# EAGLE board Type-C_Panelized (EAGLE 9.5.2)
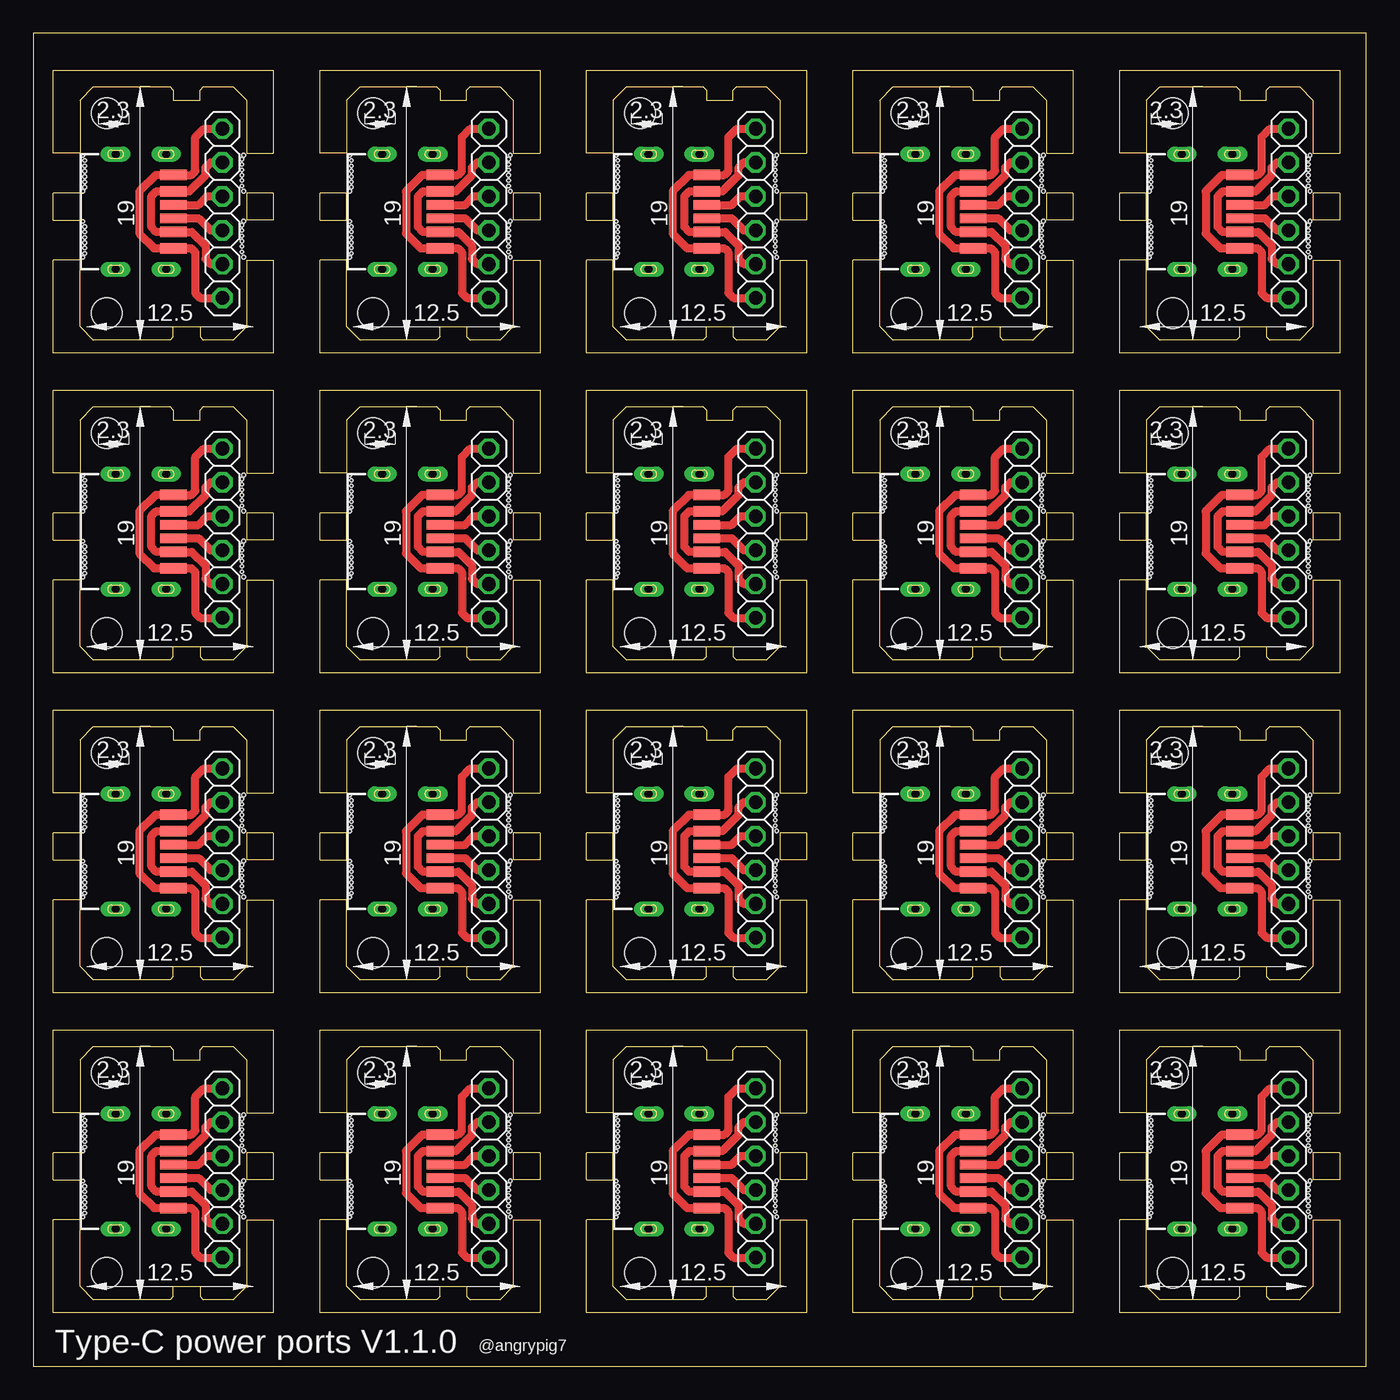
[diagram p0: board, top side]
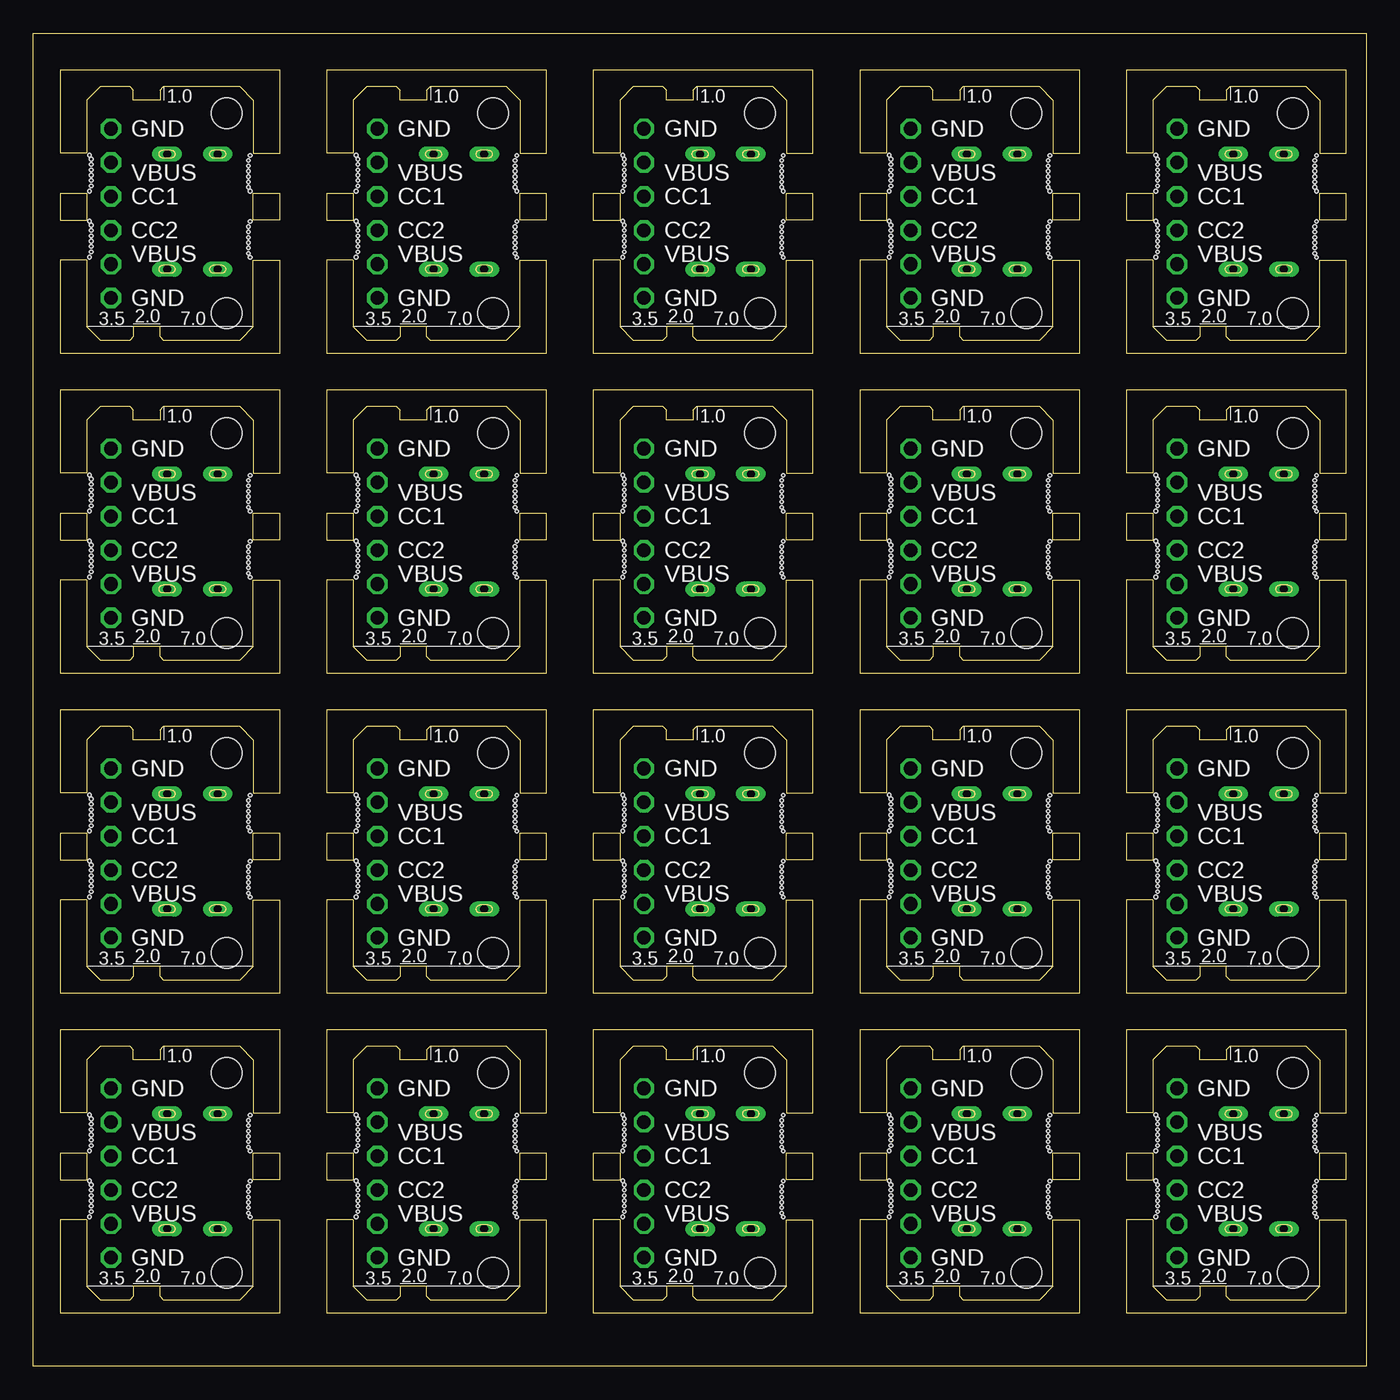
[diagram p1: board, bottom side, seen from below]

Size 100 x 100 mm. Coordinates in mm from the lower left corner, seen from the top.
Outline: 3.5,78 3.5,83 1.5,83 1.5,76.02 18,76.02 18,83 16,83 16,78 15,77 12.75,77 12.5,77.25 12.5,78 10.5,78 10.5,77.25 10.25,77 4.5,77 3.5,78
Outline: 3.5,86 3.5,88 1.5,88 1.5,86 3.5,86
Outline: 4.5,96 10.25,96 10.5,95.75 10.5,95 12.5,95 12.5,95.75 12.75,96 15,96 16,95 16,91 18,91 18,97.25 1.5,97.25 1.5,91 3.5,91 3.5,95 4.5,96
Outline: 16,88 16,86 18,86 18,88 16,88
Outline: 0,0 100,0 100,100 0,100 0,0
Outline: 23.5,78 23.5,83 21.5,83 21.5,76.02 38,76.02 38,83 36,83 36,78 35,77 32.75,77 32.5,77.25 32.5,78 30.5,78 30.5,77.25 30.25,77 24.5,77 23.5,78
Outline: 23.5,86 23.5,88 21.5,88 21.5,86 23.5,86
Outline: 24.5,96 30.25,96 30.5,95.75 30.5,95 32.5,95 32.5,95.75 32.75,96 35,96 36,95 36,91 38,91 38,97.25 21.5,97.25 21.5,91 23.5,91 23.5,95 24.5,96
Outline: 36,88 36,86 38,86 38,88 36,88
Outline: 43.5,78 43.5,83 41.5,83 41.5,76.02 58,76.02 58,83 56,83 56,78 55,77 52.75,77 52.5,77.25 52.5,78 50.5,78 50.5,77.25 50.25,77 44.5,77 43.5,78
Outline: 43.5,86 43.5,88 41.5,88 41.5,86 43.5,86
Outline: 44.5,96 50.25,96 50.5,95.75 50.5,95 52.5,95 52.5,95.75 52.75,96 55,96 56,95 56,91 58,91 58,97.25 41.5,97.25 41.5,91 43.5,91 43.5,95 44.5,96
Outline: 56,88 56,86 58,86 58,88 56,88
Outline: 63.5,78 63.5,83 61.5,83 61.5,76.02 78,76.02 78,83 76,83 76,78 75,77 72.75,77 72.5,77.25 72.5,78 70.5,78 70.5,77.25 70.25,77 64.5,77 63.5,78
Outline: 63.5,86 63.5,88 61.5,88 61.5,86 63.5,86
Outline: 64.5,96 70.25,96 70.5,95.75 70.5,95 72.5,95 72.5,95.75 72.75,96 75,96 76,95 76,91 78,91 78,97.25 61.5,97.25 61.5,91 63.5,91 63.5,95 64.5,96
Outline: 76,88 76,86 78,86 78,88 76,88
Outline: 83.5,78 83.5,83 81.5,83 81.5,76.02 98,76.02 98,83 96,83 96,78 95,77 92.75,77 92.5,77.25 92.5,78 90.5,78 90.5,77.25 90.25,77 84.5,77 83.5,78
Outline: 83.5,86 83.5,88 81.5,88 81.5,86 83.5,86
Outline: 84.5,96 90.25,96 90.5,95.75 90.5,95 92.5,95 92.5,95.75 92.75,96 95,96 96,95 96,91 98,91 98,97.25 81.5,97.25 81.5,91 83.5,91 83.5,95 84.5,96
Outline: 96,88 96,86 98,86 98,88 96,88
Outline: 3.5,54 3.5,59 1.5,59 1.5,52.02 18,52.02 18,59 16,59 16,54 15,53 12.75,53 12.5,53.25 12.5,54 10.5,54 10.5,53.25 10.25,53 4.5,53 3.5,54
Outline: 3.5,62 3.5,64 1.5,64 1.5,62 3.5,62
Outline: 4.5,72 10.25,72 10.5,71.75 10.5,71 12.5,71 12.5,71.75 12.75,72 15,72 16,71 16,67 18,67 18,73.25 1.5,73.25 1.5,67 3.5,67 3.5,71 4.5,72
Outline: 16,64 16,62 18,62 18,64 16,64
Outline: 23.5,54 23.5,59 21.5,59 21.5,52.02 38,52.02 38,59 36,59 36,54 35,53 32.75,53 32.5,53.25 32.5,54 30.5,54 30.5,53.25 30.25,53 24.5,53 23.5,54
Outline: 23.5,62 23.5,64 21.5,64 21.5,62 23.5,62
Outline: 24.5,72 30.25,72 30.5,71.75 30.5,71 32.5,71 32.5,71.75 32.75,72 35,72 36,71 36,67 38,67 38,73.25 21.5,73.25 21.5,67 23.5,67 23.5,71 24.5,72
Outline: 36,64 36,62 38,62 38,64 36,64
Outline: 43.5,54 43.5,59 41.5,59 41.5,52.02 58,52.02 58,59 56,59 56,54 55,53 52.75,53 52.5,53.25 52.5,54 50.5,54 50.5,53.25 50.25,53 44.5,53 43.5,54
Outline: 43.5,62 43.5,64 41.5,64 41.5,62 43.5,62
Outline: 44.5,72 50.25,72 50.5,71.75 50.5,71 52.5,71 52.5,71.75 52.75,72 55,72 56,71 56,67 58,67 58,73.25 41.5,73.25 41.5,67 43.5,67 43.5,71 44.5,72
Outline: 56,64 56,62 58,62 58,64 56,64
Outline: 63.5,54 63.5,59 61.5,59 61.5,52.02 78,52.02 78,59 76,59 76,54 75,53 72.75,53 72.5,53.25 72.5,54 70.5,54 70.5,53.25 70.25,53 64.5,53 63.5,54
Outline: 63.5,62 63.5,64 61.5,64 61.5,62 63.5,62
Outline: 64.5,72 70.25,72 70.5,71.75 70.5,71 72.5,71 72.5,71.75 72.75,72 75,72 76,71 76,67 78,67 78,73.25 61.5,73.25 61.5,67 63.5,67 63.5,71 64.5,72
Outline: 76,64 76,62 78,62 78,64 76,64
Outline: 83.5,54 83.5,59 81.5,59 81.5,52.02 98,52.02 98,59 96,59 96,54 95,53 92.75,53 92.5,53.25 92.5,54 90.5,54 90.5,53.25 90.25,53 84.5,53 83.5,54
Outline: 83.5,62 83.5,64 81.5,64 81.5,62 83.5,62
Outline: 84.5,72 90.25,72 90.5,71.75 90.5,71 92.5,71 92.5,71.75 92.75,72 95,72 96,71 96,67 98,67 98,73.25 81.5,73.25 81.5,67 83.5,67 83.5,71 84.5,72
Outline: 96,64 96,62 98,62 98,64 96,64
Outline: 3.5,30 3.5,35 1.5,35 1.5,28.02 18,28.02 18,35 16,35 16,30 15,29 12.75,29 12.5,29.25 12.5,30 10.5,30 10.5,29.25 10.25,29 4.5,29 3.5,30
Outline: 3.5,38 3.5,40 1.5,40 1.5,38 3.5,38
Outline: 4.5,48 10.25,48 10.5,47.75 10.5,47 12.5,47 12.5,47.75 12.75,48 15,48 16,47 16,43 18,43 18,49.25 1.5,49.25 1.5,43 3.5,43 3.5,47 4.5,48
Outline: 16,40 16,38 18,38 18,40 16,40
Outline: 23.5,30 23.5,35 21.5,35 21.5,28.02 38,28.02 38,35 36,35 36,30 35,29 32.75,29 32.5,29.25 32.5,30 30.5,30 30.5,29.25 30.25,29 24.5,29 23.5,30
Outline: 23.5,38 23.5,40 21.5,40 21.5,38 23.5,38
Outline: 24.5,48 30.25,48 30.5,47.75 30.5,47 32.5,47 32.5,47.75 32.75,48 35,48 36,47 36,43 38,43 38,49.25 21.5,49.25 21.5,43 23.5,43 23.5,47 24.5,48
Outline: 36,40 36,38 38,38 38,40 36,40
Outline: 43.5,30 43.5,35 41.5,35 41.5,28.02 58,28.02 58,35 56,35 56,30 55,29 52.75,29 52.5,29.25 52.5,30 50.5,30 50.5,29.25 50.25,29 44.5,29 43.5,30
Outline: 43.5,38 43.5,40 41.5,40 41.5,38 43.5,38
Outline: 44.5,48 50.25,48 50.5,47.75 50.5,47 52.5,47 52.5,47.75 52.75,48 55,48 56,47 56,43 58,43 58,49.25 41.5,49.25 41.5,43 43.5,43 43.5,47 44.5,48
Outline: 56,40 56,38 58,38 58,40 56,40
Outline: 63.5,30 63.5,35 61.5,35 61.5,28.02 78,28.02 78,35 76,35 76,30 75,29 72.75,29 72.5,29.25 72.5,30 70.5,30 70.5,29.25 70.25,29 64.5,29 63.5,30
Outline: 63.5,38 63.5,40 61.5,40 61.5,38 63.5,38
Outline: 64.5,48 70.25,48 70.5,47.75 70.5,47 72.5,47 72.5,47.75 72.75,48 75,48 76,47 76,43 78,43 78,49.25 61.5,49.25 61.5,43 63.5,43 63.5,47 64.5,48
Outline: 76,40 76,38 78,38 78,40 76,40
Outline: 83.5,30 83.5,35 81.5,35 81.5,28.02 98,28.02 98,35 96,35 96,30 95,29 92.75,29 92.5,29.25 92.5,30 90.5,30 90.5,29.25 90.25,29 84.5,29 83.5,30
Outline: 83.5,38 83.5,40 81.5,40 81.5,38 83.5,38
Outline: 84.5,48 90.25,48 90.5,47.75 90.5,47 92.5,47 92.5,47.75 92.75,48 95,48 96,47 96,43 98,43 98,49.25 81.5,49.25 81.5,43 83.5,43 83.5,47 84.5,48
Outline: 96,40 96,38 98,38 98,40 96,40
Outline: 3.5,6 3.5,11 1.5,11 1.5,4.02 18,4.02 18,11 16,11 16,6 15,5 12.75,5 12.5,5.25 12.5,6 10.5,6 10.5,5.25 10.25,5 4.5,5 3.5,6
Outline: 3.5,14 3.5,16 1.5,16 1.5,14 3.5,14
Outline: 4.5,24 10.25,24 10.5,23.75 10.5,23 12.5,23 12.5,23.75 12.75,24 15,24 16,23 16,19 18,19 18,25.25 1.5,25.25 1.5,19 3.5,19 3.5,23 4.5,24
Outline: 16,16 16,14 18,14 18,16 16,16
Outline: 23.5,6 23.5,11 21.5,11 21.5,4.02 38,4.02 38,11 36,11 36,6 35,5 32.75,5 32.5,5.25 32.5,6 30.5,6 30.5,5.25 30.25,5 24.5,5 23.5,6
Outline: 23.5,14 23.5,16 21.5,16 21.5,14 23.5,14
Outline: 24.5,24 30.25,24 30.5,23.75 30.5,23 32.5,23 32.5,23.75 32.75,24 35,24 36,23 36,19 38,19 38,25.25 21.5,25.25 21.5,19 23.5,19 23.5,23 24.5,24
Outline: 36,16 36,14 38,14 38,16 36,16
Outline: 43.5,6 43.5,11 41.5,11 41.5,4.02 58,4.02 58,11 56,11 56,6 55,5 52.75,5 52.5,5.25 52.5,6 50.5,6 50.5,5.25 50.25,5 44.5,5 43.5,6
Outline: 43.5,14 43.5,16 41.5,16 41.5,14 43.5,14
Outline: 44.5,24 50.25,24 50.5,23.75 50.5,23 52.5,23 52.5,23.75 52.75,24 55,24 56,23 56,19 58,19 58,25.25 41.5,25.25 41.5,19 43.5,19 43.5,23 44.5,24
Outline: 56,16 56,14 58,14 58,16 56,16
Outline: 63.5,6 63.5,11 61.5,11 61.5,4.02 78,4.02 78,11 76,11 76,6 75,5 72.75,5 72.5,5.25 72.5,6 70.5,6 70.5,5.25 70.25,5 64.5,5 63.5,6
Outline: 63.5,14 63.5,16 61.5,16 61.5,14 63.5,14
Outline: 64.5,24 70.25,24 70.5,23.75 70.5,23 72.5,23 72.5,23.75 72.75,24 75,24 76,23 76,19 78,19 78,25.25 61.5,25.25 61.5,19 63.5,19 63.5,23 64.5,24
Outline: 76,16 76,14 78,14 78,16 76,16
Outline: 83.5,6 83.5,11 81.5,11 81.5,4.02 98,4.02 98,11 96,11 96,6 95,5 92.75,5 92.5,5.25 92.5,6 90.5,6 90.5,5.25 90.25,5 84.5,5 83.5,6
Outline: 83.5,14 83.5,16 81.5,16 81.5,14 83.5,14
Outline: 84.5,24 90.25,24 90.5,23.75 90.5,23 92.5,23 92.5,23.75 92.75,24 95,24 96,23 96,19 98,19 98,25.25 81.5,25.25 81.5,19 83.5,19 83.5,23 84.5,24
Outline: 96,16 96,14 98,14 98,16 96,16
Copper layers (1*16): Top 0.035mm / dielectric 1.5mm / Bottom 0.035mm
Design rules "default *": minimum track width 6mil, minimum drill 0.35mm, track to track 6mil, track to pad 6mil, pad to pad 6mil, via to via 6mil, smd to smd 6mil, copper to edge 4mil, drill to drill 6mil, minimum pad ring 10mil, minimum via ring 8mil, stop-mask expansion 4mil, vias tented up to drill 0mil, thermal gap 10mil
Holes 2.3 mm at 5.5,94 5.5,79 25.5,94 25.5,79 45.5,94 45.5,79 65.5,94 65.5,79 85.5,94 85.5,79 5.5,70 5.5,55 25.5,70 25.5,55 45.5,70 45.5,55 65.5,70 65.5,55 85.5,70 85.5,55 5.5,46 5.5,31 25.5,46 25.5,31 45.5,46 45.5,31 65.5,46 65.5,31 85.5,46 85.5,31 5.5,22 5.5,7 25.5,22 25.5,7 45.5,22 45.5,7 65.5,22 65.5,7 85.5,22 85.5,7
Holes 0.25 mm at 3.73,90.85 3.85,90.45 3.85,90.05 3.85,89.65 3.85,89.25 3.85,88.85 3.85,88.45 3.73,88.15 3.73,85.9 3.85,85.5 3.85,85.1 3.85,84.7 3.85,84.3 3.85,83.9 3.85,83.5 3.73,83.2 15.78,88.15 15.65,88.55 15.65,88.95 15.65,89.35 15.65,89.75 15.65,90.15 15.65,90.55 15.78,90.85 15.78,83.2 15.65,83.6 15.65,84 15.65,84.4 15.65,84.8 15.65,85.2 15.65,85.6 15.78,85.9 23.73,90.85 23.85,90.45 23.85,90.05 23.85,89.65 23.85,89.25 23.85,88.85 23.85,88.45 23.73,88.15 23.73,85.9 23.85,85.5 23.85,85.1 23.85,84.7 23.85,84.3 23.85,83.9 23.85,83.5 23.73,83.2 35.78,88.15 35.65,88.55 35.65,88.95 35.65,89.35 35.65,89.75 35.65,90.15 35.65,90.55 35.78,90.85 35.78,83.2 35.65,83.6 35.65,84 35.65,84.4 35.65,84.8 35.65,85.2 35.65,85.6 35.78,85.9 43.73,90.85 43.85,90.45 43.85,90.05 43.85,89.65 43.85,89.25 43.85,88.85 43.85,88.45 43.73,88.15 43.73,85.9 43.85,85.5 43.85,85.1 43.85,84.7 43.85,84.3 43.85,83.9 43.85,83.5 43.73,83.2 55.78,88.15 55.65,88.55 55.65,88.95 55.65,89.35 55.65,89.75 55.65,90.15 55.65,90.55 55.78,90.85 55.78,83.2 55.65,83.6 55.65,84 55.65,84.4 55.65,84.8 55.65,85.2 55.65,85.6 55.78,85.9 63.73,90.85 63.85,90.45 63.85,90.05 63.85,89.65 63.85,89.25 63.85,88.85 63.85,88.45 63.73,88.15 63.73,85.9 63.85,85.5 63.85,85.1 63.85,84.7 63.85,84.3 63.85,83.9 63.85,83.5 63.73,83.2 75.78,88.15 75.65,88.55 75.65,88.95 75.65,89.35 75.65,89.75 75.65,90.15 75.65,90.55 75.78,90.85 75.78,83.2 75.65,83.6 75.65,84 75.65,84.4 75.65,84.8 75.65,85.2 75.65,85.6 75.78,85.9 83.73,90.85 83.85,90.45 83.85,90.05 83.85,89.65 83.85,89.25 83.85,88.85 83.85,88.45 83.73,88.15 83.73,85.9 83.85,85.5 83.85,85.1 83.85,84.7 83.85,84.3 83.85,83.9 83.85,83.5 83.73,83.2 95.78,88.15 95.65,88.55 95.65,88.95 95.65,89.35 95.65,89.75 95.65,90.15 95.65,90.55 95.78,90.85 95.78,83.2 95.65,83.6 95.65,84 95.65,84.4 95.65,84.8 95.65,85.2 95.65,85.6 95.78,85.9 3.73,66.85 3.85,66.45 3.85,66.05 3.85,65.65 3.85,65.25 3.85,64.85 3.85,64.45 3.73,64.15 3.73,61.9 3.85,61.5 3.85,61.1 3.85,60.7 3.85,60.3 3.85,59.9 3.85,59.5 3.73,59.2 15.78,64.15 15.65,64.55 15.65,64.95 15.65,65.35 15.65,65.75 15.65,66.15 15.65,66.55 15.78,66.85 15.78,59.2 15.65,59.6 15.65,60 15.65,60.4 15.65,60.8 15.65,61.2 15.65,61.6 15.78,61.9 23.73,66.85 23.85,66.45 23.85,66.05 23.85,65.65 23.85,65.25 23.85,64.85 23.85,64.45 23.73,64.15 23.73,61.9 23.85,61.5 23.85,61.1 23.85,60.7 23.85,60.3 23.85,59.9 23.85,59.5 23.73,59.2 35.78,64.15 35.65,64.55 35.65,64.95 35.65,65.35 35.65,65.75 35.65,66.15 35.65,66.55 35.78,66.85 35.78,59.2 35.65,59.6 35.65,60 35.65,60.4 35.65,60.8 35.65,61.2 35.65,61.6 35.78,61.9 43.73,66.85 43.85,66.45 43.85,66.05 43.85,65.65 43.85,65.25 43.85,64.85 43.85,64.45 43.73,64.15 43.73,61.9 43.85,61.5 43.85,61.1 43.85,60.7 43.85,60.3 43.85,59.9 43.85,59.5 43.73,59.2 55.78,64.15 55.65,64.55 55.65,64.95 55.65,65.35 55.65,65.75 55.65,66.15 55.65,66.55 55.78,66.85 55.78,59.2 55.65,59.6 55.65,60 55.65,60.4 55.65,60.8 55.65,61.2 55.65,61.6 55.78,61.9 63.73,66.85 63.85,66.45 63.85,66.05 63.85,65.65 63.85,65.25 63.85,64.85 63.85,64.45 63.73,64.15 63.73,61.9 63.85,61.5 63.85,61.1 63.85,60.7 63.85,60.3 63.85,59.9 63.85,59.5 63.73,59.2 75.78,64.15 75.65,64.55 75.65,64.95 75.65,65.35 75.65,65.75 75.65,66.15 75.65,66.55 75.78,66.85 75.78,59.2 75.65,59.6 75.65,60 75.65,60.4 75.65,60.8 75.65,61.2 75.65,61.6 75.78,61.9 83.73,66.85 83.85,66.45 83.85,66.05 83.85,65.65 83.85,65.25 83.85,64.85 83.85,64.45 83.73,64.15 83.73,61.9 83.85,61.5 83.85,61.1 83.85,60.7 83.85,60.3 83.85,59.9 83.85,59.5 83.73,59.2 95.78,64.15 95.65,64.55 95.65,64.95 95.65,65.35 95.65,65.75 95.65,66.15 95.65,66.55 95.78,66.85 95.78,59.2 95.65,59.6 95.65,60 95.65,60.4 95.65,60.8 95.65,61.2 95.65,61.6 95.78,61.9 3.73,42.85 3.85,42.45 3.85,42.05 3.85,41.65 3.85,41.25 3.85,40.85 3.85,40.45 3.73,40.15 3.73,37.9 3.85,37.5 3.85,37.1 3.85,36.7 3.85,36.3 3.85,35.9 3.85,35.5 3.73,35.2 15.78,40.15 15.65,40.55 15.65,40.95 15.65,41.35 15.65,41.75 15.65,42.15 15.65,42.55 15.78,42.85 15.78,35.2 15.65,35.6 15.65,36 15.65,36.4 15.65,36.8 15.65,37.2 15.65,37.6 15.78,37.9 23.73,42.85 23.85,42.45 23.85,42.05 23.85,41.65 23.85,41.25 23.85,40.85 23.85,40.45 23.73,40.15 23.73,37.9 23.85,37.5 23.85,37.1 23.85,36.7 23.85,36.3 23.85,35.9 23.85,35.5 23.73,35.2 35.78,40.15 35.65,40.55 35.65,40.95 35.65,41.35 35.65,41.75 35.65,42.15 35.65,42.55 35.78,42.85 35.78,35.2 35.65,35.6 35.65,36 35.65,36.4 35.65,36.8 35.65,37.2 35.65,37.6 35.78,37.9 43.73,42.85 43.85,42.45 43.85,42.05 43.85,41.65 43.85,41.25 43.85,40.85 43.85,40.45 43.73,40.15 43.73,37.9 43.85,37.5 43.85,37.1 43.85,36.7 43.85,36.3 43.85,35.9 43.85,35.5 43.73,35.2 55.78,40.15 55.65,40.55 55.65,40.95 55.65,41.35 55.65,41.75 55.65,42.15 55.65,42.55 55.78,42.85 55.78,35.2 55.65,35.6 55.65,36 55.65,36.4 55.65,36.8 55.65,37.2 55.65,37.6 55.78,37.9 63.73,42.85 63.85,42.45 63.85,42.05 63.85,41.65 63.85,41.25 63.85,40.85 63.85,40.45 63.73,40.15 63.73,37.9 63.85,37.5 63.85,37.1 63.85,36.7 63.85,36.3 63.85,35.9 63.85,35.5 63.73,35.2 75.78,40.15 75.65,40.55 75.65,40.95 75.65,41.35 75.65,41.75 75.65,42.15 75.65,42.55 75.78,42.85 75.78,35.2 75.65,35.6 75.65,36 75.65,36.4 75.65,36.8 75.65,37.2 75.65,37.6 75.78,37.9 83.73,42.85 83.85,42.45 83.85,42.05 83.85,41.65 83.85,41.25 83.85,40.85 83.85,40.45 83.73,40.15 83.73,37.9 83.85,37.5 83.85,37.1 83.85,36.7 83.85,36.3 83.85,35.9 83.85,35.5 83.73,35.2 95.78,40.15 95.65,40.55 95.65,40.95 95.65,41.35 95.65,41.75 95.65,42.15 95.65,42.55 95.78,42.85 95.78,35.2 95.65,35.6 95.65,36 95.65,36.4 95.65,36.8 95.65,37.2 95.65,37.6 95.78,37.9 3.73,18.85 3.85,18.45 3.85,18.05 3.85,17.65 3.85,17.25 3.85,16.85 3.85,16.45 3.73,16.15 3.73,13.9 3.85,13.5 3.85,13.1 3.85,12.7 3.85,12.3 3.85,11.9 3.85,11.5 3.73,11.2 15.78,16.15 15.65,16.55 15.65,16.95 15.65,17.35 15.65,17.75 15.65,18.15 15.65,18.55 15.78,18.85 15.78,11.2 15.65,11.6 15.65,12 15.65,12.4 15.65,12.8 15.65,13.2 15.65,13.6 15.78,13.9 23.73,18.85 23.85,18.45 23.85,18.05 23.85,17.65 23.85,17.25 23.85,16.85 23.85,16.45 23.73,16.15 23.73,13.9 23.85,13.5 23.85,13.1 23.85,12.7 23.85,12.3 23.85,11.9 23.85,11.5 23.73,11.2 35.78,16.15 35.65,16.55 35.65,16.95 35.65,17.35 35.65,17.75 35.65,18.15 35.65,18.55 35.78,18.85 35.78,11.2 35.65,11.6 35.65,12 35.65,12.4 35.65,12.8 35.65,13.2 35.65,13.6 35.78,13.9 43.73,18.85 43.85,18.45 43.85,18.05 43.85,17.65 43.85,17.25 43.85,16.85 43.85,16.45 43.73,16.15 43.73,13.9 43.85,13.5 43.85,13.1 43.85,12.7 43.85,12.3 43.85,11.9 43.85,11.5 43.73,11.2 55.78,16.15 55.65,16.55 55.65,16.95 55.65,17.35 55.65,17.75 55.65,18.15 55.65,18.55 55.78,18.85 55.78,11.2 55.65,11.6 55.65,12 55.65,12.4 55.65,12.8 55.65,13.2 55.65,13.6 55.78,13.9 63.73,18.85 63.85,18.45 63.85,18.05 63.85,17.65 63.85,17.25 63.85,16.85 63.85,16.45 63.73,16.15 63.73,13.9 63.85,13.5 63.85,13.1 63.85,12.7 63.85,12.3 63.85,11.9 63.85,11.5 63.73,11.2 75.78,16.15 75.65,16.55 75.65,16.95 75.65,17.35 75.65,17.75 75.65,18.15 75.65,18.55 75.78,18.85 75.78,11.2 75.65,11.6 75.65,12 75.65,12.4 75.65,12.8 75.65,13.2 75.65,13.6 75.78,13.9 83.73,18.85 83.85,18.45 83.85,18.05 83.85,17.65 83.85,17.25 83.85,16.85 83.85,16.45 83.73,16.15 83.73,13.9 83.85,13.5 83.85,13.1 83.85,12.7 83.85,12.3 83.85,11.9 83.85,11.5 83.73,11.2 95.78,16.15 95.65,16.55 95.65,16.95 95.65,17.35 95.65,17.75 95.65,18.15 95.65,18.55 95.78,18.85 95.78,11.2 95.65,11.6 95.65,12 95.65,12.4 95.65,12.8 95.65,13.2 95.65,13.6 95.78,13.9

## Footprints (pad centres in the part's own frame; a part is rotated, then mirrored left to right if it is on the bottom)
TYPE-C-31-M-17 = smd 0.7 x 2: CC1 -0.5,0.4; CC2 0.5,0.4 | smd 0.8 x 2: GND -2.75,0.4; GND_2 2.75,0.4 | drill 0.6 pad 1.1 long: P$1 4.32,-3.95; P$2 4.32,-0.15; P$3 -4.32,-0.15; P$4 -4.32,-3.95 | smd 0.76 x 2: VBUS -1.52,0.4; VBUS_2 1.52,0.4
1X06/OCT = drill 1.016 octagon: 1 -6.35,0; 2 -3.81,0; 3 -1.27,0; 4 1.27,0; 5 3.81,0; 6 6.35,0

## Placement (x,y rotation side)
J1  TYPE-C-31-M-17  [TYPE-C-31-M-17]  10.12,86.62 270 top
J2  TYPE-C-31-M-17  [TYPE-C-31-M-17]  30.12,86.62 270 top
J3  TYPE-C-31-M-17  [TYPE-C-31-M-17]  50.12,86.62 270 top
J4  TYPE-C-31-M-17  [TYPE-C-31-M-17]  70.12,86.62 270 top
J5  TYPE-C-31-M-17  [TYPE-C-31-M-17]  90.12,86.62 270 top
J6  TYPE-C-31-M-17  [TYPE-C-31-M-17]  10.12,62.62 270 top
J7  TYPE-C-31-M-17  [TYPE-C-31-M-17]  30.12,62.62 270 top
J8  TYPE-C-31-M-17  [TYPE-C-31-M-17]  50.12,62.62 270 top
J9  TYPE-C-31-M-17  [TYPE-C-31-M-17]  70.12,62.62 270 top
J10  TYPE-C-31-M-17  [TYPE-C-31-M-17]  90.12,62.62 270 top
J11  TYPE-C-31-M-17  [TYPE-C-31-M-17]  10.12,38.62 270 top
J12  TYPE-C-31-M-17  [TYPE-C-31-M-17]  30.12,38.62 270 top
J13  TYPE-C-31-M-17  [TYPE-C-31-M-17]  50.12,38.62 270 top
J14  TYPE-C-31-M-17  [TYPE-C-31-M-17]  70.12,38.62 270 top
J15  TYPE-C-31-M-17  [TYPE-C-31-M-17]  90.12,38.62 270 top
J16  TYPE-C-31-M-17  [TYPE-C-31-M-17]  10.12,14.62 270 top
J17  TYPE-C-31-M-17  [TYPE-C-31-M-17]  30.12,14.62 270 top
J18  TYPE-C-31-M-17  [TYPE-C-31-M-17]  50.12,14.62 270 top
J19  TYPE-C-31-M-17  [TYPE-C-31-M-17]  70.12,14.62 270 top
J20  TYPE-C-31-M-17  [TYPE-C-31-M-17]  90.12,14.62 270 top
JP1  [1X06/OCT]  14.18,86.49 90 top
JP2  [1X06/OCT]  34.18,86.49 90 top
JP3  [1X06/OCT]  54.18,86.49 90 top
JP4  [1X06/OCT]  74.18,86.49 90 top
JP5  [1X06/OCT]  94.18,86.49 90 top
JP6  [1X06/OCT]  14.18,62.49 90 top
JP7  [1X06/OCT]  34.18,62.49 90 top
JP8  [1X06/OCT]  54.18,62.49 90 top
JP9  [1X06/OCT]  74.18,62.49 90 top
JP10  [1X06/OCT]  94.18,62.49 90 top
JP11  [1X06/OCT]  14.18,38.49 90 top
JP12  [1X06/OCT]  34.18,38.49 90 top
JP13  [1X06/OCT]  54.18,38.49 90 top
JP14  [1X06/OCT]  74.18,38.49 90 top
JP15  [1X06/OCT]  94.18,38.49 90 top
JP16  [1X06/OCT]  14.18,14.49 90 top
JP17  [1X06/OCT]  34.18,14.49 90 top
JP18  [1X06/OCT]  54.18,14.49 90 top
JP19  [1X06/OCT]  74.18,14.49 90 top
JP20  [1X06/OCT]  94.18,14.49 90 top

## Library data of the parts
J1-J20 = angrypig7_Library
JP1-JP20 = pinhead_v2

## Nets
N$1: J1.VBUS J1.VBUS_2 JP1.2 JP1.5
N$2: J1.GND J1.GND_2 JP1.1 JP1.6
N$3: J1.CC1 JP1.4
N$4: J1.CC2 JP1.3
N$5: J2.VBUS J2.VBUS_2 JP2.2 JP2.5
N$6: J2.GND J2.GND_2 JP2.1 JP2.6
N$7: J2.CC1 JP2.4
N$8: J2.CC2 JP2.3
N$9: J3.VBUS J3.VBUS_2 JP3.2 JP3.5
N$10: J3.GND J3.GND_2 JP3.1 JP3.6
N$11: J3.CC1 JP3.4
N$12: J3.CC2 JP3.3
N$13: J4.VBUS J4.VBUS_2 JP4.2 JP4.5
N$14: J4.GND J4.GND_2 JP4.1 JP4.6
N$15: J4.CC1 JP4.4
N$16: J4.CC2 JP4.3
N$17: J5.VBUS J5.VBUS_2 JP5.2 JP5.5
N$18: J5.GND J5.GND_2 JP5.1 JP5.6
N$19: J5.CC1 JP5.4
N$20: J5.CC2 JP5.3
N$21: J6.VBUS J6.VBUS_2 JP6.2 JP6.5
N$22: J6.GND J6.GND_2 JP6.1 JP6.6
N$23: J6.CC1 JP6.4
N$24: J6.CC2 JP6.3
N$25: J7.VBUS J7.VBUS_2 JP7.2 JP7.5
N$26: J7.GND J7.GND_2 JP7.1 JP7.6
N$27: J7.CC1 JP7.4
N$28: J7.CC2 JP7.3
N$29: J8.VBUS J8.VBUS_2 JP8.2 JP8.5
N$30: J8.GND J8.GND_2 JP8.1 JP8.6
N$31: J8.CC1 JP8.4
N$32: J8.CC2 JP8.3
N$33: J9.VBUS J9.VBUS_2 JP9.2 JP9.5
N$34: J9.GND J9.GND_2 JP9.1 JP9.6
N$35: J9.CC1 JP9.4
N$36: J9.CC2 JP9.3
N$37: J10.VBUS J10.VBUS_2 JP10.2 JP10.5
N$38: J10.GND J10.GND_2 JP10.1 JP10.6
N$39: J10.CC1 JP10.4
N$40: J10.CC2 JP10.3
N$41: J11.VBUS J11.VBUS_2 JP11.2 JP11.5
N$42: J11.GND J11.GND_2 JP11.1 JP11.6
N$43: J11.CC1 JP11.4
N$44: J11.CC2 JP11.3
N$45: J12.VBUS J12.VBUS_2 JP12.2 JP12.5
N$46: J12.GND J12.GND_2 JP12.1 JP12.6
N$47: J12.CC1 JP12.4
N$48: J12.CC2 JP12.3
N$49: J13.VBUS J13.VBUS_2 JP13.2 JP13.5
N$50: J13.GND J13.GND_2 JP13.1 JP13.6
N$51: J13.CC1 JP13.4
N$52: J13.CC2 JP13.3
N$53: J14.VBUS J14.VBUS_2 JP14.2 JP14.5
N$54: J14.GND J14.GND_2 JP14.1 JP14.6
N$55: J14.CC1 JP14.4
N$56: J14.CC2 JP14.3
N$57: J15.VBUS J15.VBUS_2 JP15.2 JP15.5
N$58: J15.GND J15.GND_2 JP15.1 JP15.6
N$59: J15.CC1 JP15.4
N$60: J15.CC2 JP15.3
N$61: J16.VBUS J16.VBUS_2 JP16.2 JP16.5
N$62: J16.GND J16.GND_2 JP16.1 JP16.6
N$63: J16.CC1 JP16.4
N$64: J16.CC2 JP16.3
N$65: J17.VBUS J17.VBUS_2 JP17.2 JP17.5
N$66: J17.GND J17.GND_2 JP17.1 JP17.6
N$67: J17.CC1 JP17.4
N$68: J17.CC2 JP17.3
N$69: J18.VBUS J18.VBUS_2 JP18.2 JP18.5
N$70: J18.GND J18.GND_2 JP18.1 JP18.6
N$71: J18.CC1 JP18.4
N$72: J18.CC2 JP18.3
N$73: J19.VBUS J19.VBUS_2 JP19.2 JP19.5
N$74: J19.GND J19.GND_2 JP19.1 JP19.6
N$75: J19.CC1 JP19.4
N$76: J19.CC2 JP19.3
N$77: J20.VBUS J20.VBUS_2 JP20.2 JP20.5
N$78: J20.GND J20.GND_2 JP20.1 JP20.6
N$79: J20.CC1 JP20.4
N$80: J20.CC2 JP20.3

## Tracks (layer width: path | path; a pad name or v marks a point on that pad's centre or on a via)
N$1
  Top 0.61: JP1.2 13.29,82.68 12.91,83.06 12.91,84.08 11.89,85.1 J1.VBUS_2 9.23,85.1 8.85,85.48 8.85,87.76 9.23,88.14 J1.VBUS 11.7,88.14 12.91,89.35 12.91,89.92 13.29,90.3 JP1.5
N$2
  Top 0.61: JP1.1 12.53,80.14 12.15,80.52 12.15,83.57 11.85,83.87 J1.GND_2 9.06,83.87 7.96,84.97 7.96,88.14 9.19,89.37 J1.GND 11.85,89.37 12.15,89.67 12.15,92.21 12.79,92.84 JP1.6
N$3
  Top 0.61: J1.CC1 12.4,87.12 13.04,87.76 JP1.4
N$4
  Top 0.61: J1.CC2 12.4,86.12 13.29,85.22 JP1.3
N$5
  Top 0.61: JP2.2 33.3,82.68 32.91,83.06 32.91,84.08 31.89,85.1 J2.VBUS_2 29.23,85.1 28.85,85.48 28.85,87.76 29.23,88.14 J2.VBUS 31.7,88.14 32.91,89.35 32.91,89.92 33.3,90.3 JP2.5
N$6
  Top 0.61: JP2.1 32.53,80.14 32.15,80.52 32.15,83.57 31.85,83.87 J2.GND_2 29.06,83.87 27.96,84.97 27.96,88.14 29.19,89.37 J2.GND 31.85,89.37 32.15,89.67 32.15,92.21 32.79,92.84 JP2.6
N$7
  Top 0.61: J2.CC1 32.4,87.12 33.04,87.76 JP2.4
N$8
  Top 0.61: J2.CC2 32.4,86.12 33.3,85.22 JP2.3
N$9
  Top 0.61: JP3.2 53.3,82.68 52.91,83.06 52.91,84.08 51.89,85.1 J3.VBUS_2 49.23,85.1 48.85,85.48 48.85,87.76 49.23,88.14 J3.VBUS 51.7,88.14 52.91,89.35 52.91,89.92 53.3,90.3 JP3.5
N$10
  Top 0.61: JP3.1 52.53,80.14 52.15,80.52 52.15,83.57 51.85,83.87 J3.GND_2 49.06,83.87 47.96,84.97 47.96,88.14 49.19,89.37 J3.GND 51.85,89.37 52.15,89.67 52.15,92.21 52.79,92.84 JP3.6
N$11
  Top 0.61: J3.CC1 52.4,87.12 53.04,87.76 JP3.4
N$12
  Top 0.61: J3.CC2 52.4,86.12 53.3,85.22 JP3.3
N$13
  Top 0.61: JP4.2 73.3,82.68 72.91,83.06 72.91,84.08 71.89,85.1 J4.VBUS_2 69.23,85.1 68.85,85.48 68.85,87.76 69.23,88.14 J4.VBUS 71.7,88.14 72.91,89.35 72.91,89.92 73.3,90.3 JP4.5
N$14
  Top 0.61: JP4.1 72.53,80.14 72.15,80.52 72.15,83.57 71.85,83.87 J4.GND_2 69.06,83.87 67.96,84.97 67.96,88.14 69.19,89.37 J4.GND 71.85,89.37 72.15,89.67 72.15,92.21 72.79,92.84 JP4.6
N$15
  Top 0.61: J4.CC1 72.4,87.12 73.04,87.76 JP4.4
N$16
  Top 0.61: J4.CC2 72.4,86.12 73.3,85.22 JP4.3
N$17
  Top 0.61: JP5.2 93.3,82.68 92.91,83.06 92.91,84.08 91.89,85.1 J5.VBUS_2 89.23,85.1 88.85,85.48 88.85,87.76 89.23,88.14 J5.VBUS 91.7,88.14 92.91,89.35 92.91,89.92 93.3,90.3 JP5.5
N$18
  Top 0.61: JP5.1 92.53,80.14 92.15,80.52 92.15,83.57 91.85,83.87 J5.GND_2 89.06,83.87 87.96,84.97 87.96,88.14 89.19,89.37 J5.GND 91.85,89.37 92.15,89.67 92.15,92.21 92.79,92.84 JP5.6
N$19
  Top 0.61: J5.CC1 92.4,87.12 93.04,87.76 JP5.4
N$20
  Top 0.61: J5.CC2 92.4,86.12 93.3,85.22 JP5.3
N$21
  Top 0.61: JP6.2 13.29,58.68 12.91,59.06 12.91,60.08 11.89,61.1 J6.VBUS_2 9.23,61.1 8.85,61.48 8.85,63.76 9.23,64.14 J6.VBUS 11.7,64.14 12.91,65.35 12.91,65.92 13.29,66.3 JP6.5
N$22
  Top 0.61: JP6.1 12.53,56.14 12.15,56.52 12.15,59.57 11.85,59.87 J6.GND_2 9.06,59.87 7.96,60.97 7.96,64.14 9.19,65.37 J6.GND 11.85,65.37 12.15,65.67 12.15,68.21 12.79,68.84 JP6.6
N$23
  Top 0.61: J6.CC1 12.4,63.12 13.04,63.76 JP6.4
N$24
  Top 0.61: J6.CC2 12.4,62.12 13.29,61.22 JP6.3
N$25
  Top 0.61: JP7.2 33.3,58.68 32.91,59.06 32.91,60.08 31.89,61.1 J7.VBUS_2 29.23,61.1 28.85,61.48 28.85,63.76 29.23,64.14 J7.VBUS 31.7,64.14 32.91,65.35 32.91,65.92 33.3,66.3 JP7.5
N$26
  Top 0.61: JP7.1 32.53,56.14 32.15,56.52 32.15,59.57 31.85,59.87 J7.GND_2 29.06,59.87 27.96,60.97 27.96,64.14 29.19,65.37 J7.GND 31.85,65.37 32.15,65.67 32.15,68.21 32.79,68.84 JP7.6
N$27
  Top 0.61: J7.CC1 32.4,63.12 33.04,63.76 JP7.4
N$28
  Top 0.61: J7.CC2 32.4,62.12 33.3,61.22 JP7.3
N$29
  Top 0.61: JP8.2 53.3,58.68 52.91,59.06 52.91,60.08 51.89,61.1 J8.VBUS_2 49.23,61.1 48.85,61.48 48.85,63.76 49.23,64.14 J8.VBUS 51.7,64.14 52.91,65.35 52.91,65.92 53.3,66.3 JP8.5
N$30
  Top 0.61: JP8.1 52.53,56.14 52.15,56.52 52.15,59.57 51.85,59.87 J8.GND_2 49.06,59.87 47.96,60.97 47.96,64.14 49.19,65.37 J8.GND 51.85,65.37 52.15,65.67 52.15,68.21 52.79,68.84 JP8.6
N$31
  Top 0.61: J8.CC1 52.4,63.12 53.04,63.76 JP8.4
N$32
  Top 0.61: J8.CC2 52.4,62.12 53.3,61.22 JP8.3
N$33
  Top 0.61: JP9.2 73.3,58.68 72.91,59.06 72.91,60.08 71.89,61.1 J9.VBUS_2 69.23,61.1 68.85,61.48 68.85,63.76 69.23,64.14 J9.VBUS 71.7,64.14 72.91,65.35 72.91,65.92 73.3,66.3 JP9.5
N$34
  Top 0.61: JP9.1 72.53,56.14 72.15,56.52 72.15,59.57 71.85,59.87 J9.GND_2 69.06,59.87 67.96,60.97 67.96,64.14 69.19,65.37 J9.GND 71.85,65.37 72.15,65.67 72.15,68.21 72.79,68.84 JP9.6
N$35
  Top 0.61: J9.CC1 72.4,63.12 73.04,63.76 JP9.4
N$36
  Top 0.61: J9.CC2 72.4,62.12 73.3,61.22 JP9.3
N$37
  Top 0.61: JP10.2 93.3,58.68 92.91,59.06 92.91,60.08 91.89,61.1 J10.VBUS_2 89.23,61.1 88.85,61.48 88.85,63.76 89.23,64.14 J10.VBUS 91.7,64.14 92.91,65.35 92.91,65.92 93.3,66.3 JP10.5
N$38
  Top 0.61: JP10.1 92.53,56.14 92.15,56.52 92.15,59.57 91.85,59.87 J10.GND_2 89.06,59.87 87.96,60.97 87.96,64.14 89.19,65.37 J10.GND 91.85,65.37 92.15,65.67 92.15,68.21 92.79,68.84 JP10.6
N$39
  Top 0.61: J10.CC1 92.4,63.12 93.04,63.76 JP10.4
N$40
  Top 0.61: J10.CC2 92.4,62.12 93.3,61.22 JP10.3
N$41
  Top 0.61: JP11.2 13.29,34.68 12.91,35.06 12.91,36.08 11.89,37.1 J11.VBUS_2 9.23,37.1 8.85,37.48 8.85,39.76 9.23,40.14 J11.VBUS 11.7,40.14 12.91,41.35 12.91,41.92 13.29,42.3 JP11.5
N$42
  Top 0.61: JP11.1 12.53,32.14 12.15,32.52 12.15,35.57 11.85,35.87 J11.GND_2 9.06,35.87 7.96,36.97 7.96,40.14 9.19,41.37 J11.GND 11.85,41.37 12.15,41.67 12.15,44.21 12.79,44.84 JP11.6
N$43
  Top 0.61: J11.CC1 12.4,39.12 13.04,39.76 JP11.4
N$44
  Top 0.61: J11.CC2 12.4,38.12 13.29,37.22 JP11.3
N$45
  Top 0.61: JP12.2 33.3,34.68 32.91,35.06 32.91,36.08 31.89,37.1 J12.VBUS_2 29.23,37.1 28.85,37.48 28.85,39.76 29.23,40.14 J12.VBUS 31.7,40.14 32.91,41.35 32.91,41.92 33.3,42.3 JP12.5
N$46
  Top 0.61: JP12.1 32.53,32.14 32.15,32.52 32.15,35.57 31.85,35.87 J12.GND_2 29.06,35.87 27.96,36.97 27.96,40.14 29.19,41.37 J12.GND 31.85,41.37 32.15,41.67 32.15,44.21 32.79,44.84 JP12.6
N$47
  Top 0.61: J12.CC1 32.4,39.12 33.04,39.76 JP12.4
N$48
  Top 0.61: J12.CC2 32.4,38.12 33.3,37.22 JP12.3
N$49
  Top 0.61: JP13.2 53.3,34.68 52.91,35.06 52.91,36.08 51.89,37.1 J13.VBUS_2 49.23,37.1 48.85,37.48 48.85,39.76 49.23,40.14 J13.VBUS 51.7,40.14 52.91,41.35 52.91,41.92 53.3,42.3 JP13.5
N$50
  Top 0.61: JP13.1 52.53,32.14 52.15,32.52 52.15,35.57 51.85,35.87 J13.GND_2 49.06,35.87 47.96,36.97 47.96,40.14 49.19,41.37 J13.GND 51.85,41.37 52.15,41.67 52.15,44.21 52.79,44.84 JP13.6
N$51
  Top 0.61: J13.CC1 52.4,39.12 53.04,39.76 JP13.4
N$52
  Top 0.61: J13.CC2 52.4,38.12 53.3,37.22 JP13.3
N$53
  Top 0.61: JP14.2 73.3,34.68 72.91,35.06 72.91,36.08 71.89,37.1 J14.VBUS_2 69.23,37.1 68.85,37.48 68.85,39.76 69.23,40.14 J14.VBUS 71.7,40.14 72.91,41.35 72.91,41.92 73.3,42.3 JP14.5
N$54
  Top 0.61: JP14.1 72.53,32.14 72.15,32.52 72.15,35.57 71.85,35.87 J14.GND_2 69.06,35.87 67.96,36.97 67.96,40.14 69.19,41.37 J14.GND 71.85,41.37 72.15,41.67 72.15,44.21 72.79,44.84 JP14.6
N$55
  Top 0.61: J14.CC1 72.4,39.12 73.04,39.76 JP14.4
N$56
  Top 0.61: J14.CC2 72.4,38.12 73.3,37.22 JP14.3
N$57
  Top 0.61: JP15.2 93.3,34.68 92.91,35.06 92.91,36.08 91.89,37.1 J15.VBUS_2 89.23,37.1 88.85,37.48 88.85,39.76 89.23,40.14 J15.VBUS 91.7,40.14 92.91,41.35 92.91,41.92 93.3,42.3 JP15.5
N$58
  Top 0.61: JP15.1 92.53,32.14 92.15,32.52 92.15,35.57 91.85,35.87 J15.GND_2 89.06,35.87 87.96,36.97 87.96,40.14 89.19,41.37 J15.GND 91.85,41.37 92.15,41.67 92.15,44.21 92.79,44.84 JP15.6
N$59
  Top 0.61: J15.CC1 92.4,39.12 93.04,39.76 JP15.4
N$60
  Top 0.61: J15.CC2 92.4,38.12 93.3,37.22 JP15.3
N$61
  Top 0.61: JP16.2 13.29,10.68 12.91,11.06 12.91,12.08 11.89,13.1 J16.VBUS_2 9.23,13.1 8.85,13.48 8.85,15.76 9.23,16.14 J16.VBUS 11.7,16.14 12.91,17.35 12.91,17.92 13.29,18.3 JP16.5
N$62
  Top 0.61: JP16.1 12.53,8.14 12.15,8.52 12.15,11.57 11.85,11.87 J16.GND_2 9.06,11.87 7.96,12.97 7.96,16.14 9.19,17.37 J16.GND 11.85,17.37 12.15,17.67 12.15,20.21 12.79,20.84 JP16.6
N$63
  Top 0.61: J16.CC1 12.4,15.12 13.04,15.76 JP16.4
N$64
  Top 0.61: J16.CC2 12.4,14.12 13.29,13.22 JP16.3
N$65
  Top 0.61: JP17.2 33.3,10.68 32.91,11.06 32.91,12.08 31.89,13.1 J17.VBUS_2 29.23,13.1 28.85,13.48 28.85,15.76 29.23,16.14 J17.VBUS 31.7,16.14 32.91,17.35 32.91,17.92 33.3,18.3 JP17.5
N$66
  Top 0.61: JP17.1 32.53,8.14 32.15,8.52 32.15,11.57 31.85,11.87 J17.GND_2 29.06,11.87 27.96,12.97 27.96,16.14 29.19,17.37 J17.GND 31.85,17.37 32.15,17.67 32.15,20.21 32.79,20.84 JP17.6
N$67
  Top 0.61: J17.CC1 32.4,15.12 33.04,15.76 JP17.4
N$68
  Top 0.61: J17.CC2 32.4,14.12 33.3,13.22 JP17.3
N$69
  Top 0.61: JP18.2 53.3,10.68 52.91,11.06 52.91,12.08 51.89,13.1 J18.VBUS_2 49.23,13.1 48.85,13.48 48.85,15.76 49.23,16.14 J18.VBUS 51.7,16.14 52.91,17.35 52.91,17.92 53.3,18.3 JP18.5
N$70
  Top 0.61: JP18.1 52.53,8.14 52.15,8.52 52.15,11.57 51.85,11.87 J18.GND_2 49.06,11.87 47.96,12.97 47.96,16.14 49.19,17.37 J18.GND 51.85,17.37 52.15,17.67 52.15,20.21 52.79,20.84 JP18.6
N$71
  Top 0.61: J18.CC1 52.4,15.12 53.04,15.76 JP18.4
N$72
  Top 0.61: J18.CC2 52.4,14.12 53.3,13.22 JP18.3
N$73
  Top 0.61: JP19.2 73.3,10.68 72.91,11.06 72.91,12.08 71.89,13.1 J19.VBUS_2 69.23,13.1 68.85,13.48 68.85,15.76 69.23,16.14 J19.VBUS 71.7,16.14 72.91,17.35 72.91,17.92 73.3,18.3 JP19.5
N$74
  Top 0.61: JP19.1 72.53,8.14 72.15,8.52 72.15,11.57 71.85,11.87 J19.GND_2 69.06,11.87 67.96,12.97 67.96,16.14 69.19,17.37 J19.GND 71.85,17.37 72.15,17.67 72.15,20.21 72.79,20.84 JP19.6
N$75
  Top 0.61: J19.CC1 72.4,15.12 73.04,15.76 JP19.4
N$76
  Top 0.61: J19.CC2 72.4,14.12 73.3,13.22 JP19.3
N$77
  Top 0.61: JP20.2 93.3,10.68 92.91,11.06 92.91,12.08 91.89,13.1 J20.VBUS_2 89.23,13.1 88.85,13.48 88.85,15.76 89.23,16.14 J20.VBUS 91.7,16.14 92.91,17.35 92.91,17.92 93.3,18.3 JP20.5
N$78
  Top 0.61: JP20.1 92.53,8.14 92.15,8.52 92.15,11.57 91.85,11.87 J20.GND_2 89.06,11.87 87.96,12.97 87.96,16.14 89.19,17.37 J20.GND 91.85,17.37 92.15,17.67 92.15,20.21 92.79,20.84 JP20.6
N$79
  Top 0.61: J20.CC1 92.4,15.12 93.04,15.76 JP20.4
N$80
  Top 0.61: J20.CC2 92.4,14.12 93.3,13.22 JP20.3

## Text on the board
tPlace: Type-C power ports V1.1.0 | @angrypig7
bPlace: 1.0 | 1.0 | 1.0 | 1.0 | 1.0 | GND | GND | GND | GND | GND | VBUS | VBUS | VBUS | VBUS | VBUS | CC1 | CC1 | CC1 | CC1 | CC1 | CC2 | CC2 | CC2 | CC2 | CC2 | VBUS | VBUS | VBUS | VBUS | VBUS | GND | GND | GND | GND | GND | 7.0 | 2.0 | 3.5 | 7.0 | 2.0 | 3.5 | 7.0 | 2.0 | 3.5 | 7.0 | 2.0 | 3.5 | 7.0 | 2.0 | 3.5 | 1.0 | 1.0 | 1.0 | 1.0 | 1.0 | GND | GND | GND | GND | GND | VBUS | VBUS | VBUS | VBUS | VBUS | CC1 | CC1 | CC1 | CC1 | CC1 | CC2 | CC2 | CC2 | CC2 | CC2 | VBUS | VBUS | VBUS | VBUS | VBUS | GND | GND | GND | GND | GND | 7.0 | 2.0 | 3.5 | 7.0 | 2.0 | 3.5 | 7.0 | 2.0 | 3.5 | 7.0 | 2.0 | 3.5 | 7.0 | 2.0 | 3.5 | 1.0 | 1.0 | 1.0 | 1.0 | 1.0 | GND | GND | GND | GND | GND | VBUS | VBUS | VBUS | VBUS | VBUS | CC1 | CC1 | CC1 | CC1 | CC1 | CC2 | CC2 | CC2 | CC2 | CC2 | VBUS | VBUS | VBUS | VBUS | VBUS | GND | GND | GND | GND | GND | 7.0 | 2.0 | 3.5 | 7.0 | 2.0 | 3.5 | 7.0 | 2.0 | 3.5 | 7.0 | 2.0 | 3.5 | 7.0 | 2.0 | 3.5 | 1.0 | 1.0 | 1.0 | 1.0 | 1.0 | GND | GND | GND | GND | GND | VBUS | VBUS | VBUS | VBUS | VBUS | CC1 | CC1 | CC1 | CC1 | CC1 | CC2 | CC2 | CC2 | CC2 | CC2 | VBUS | VBUS | VBUS | VBUS | VBUS | GND | GND | GND | GND | GND | 7.0 | 2.0 | 3.5 | 7.0 | 2.0 | 3.5 | 7.0 | 2.0 | 3.5 | 7.0 | 2.0 | 3.5 | 7.0 | 2.0 | 3.5